# Allegro board GALVO_DRV.brd
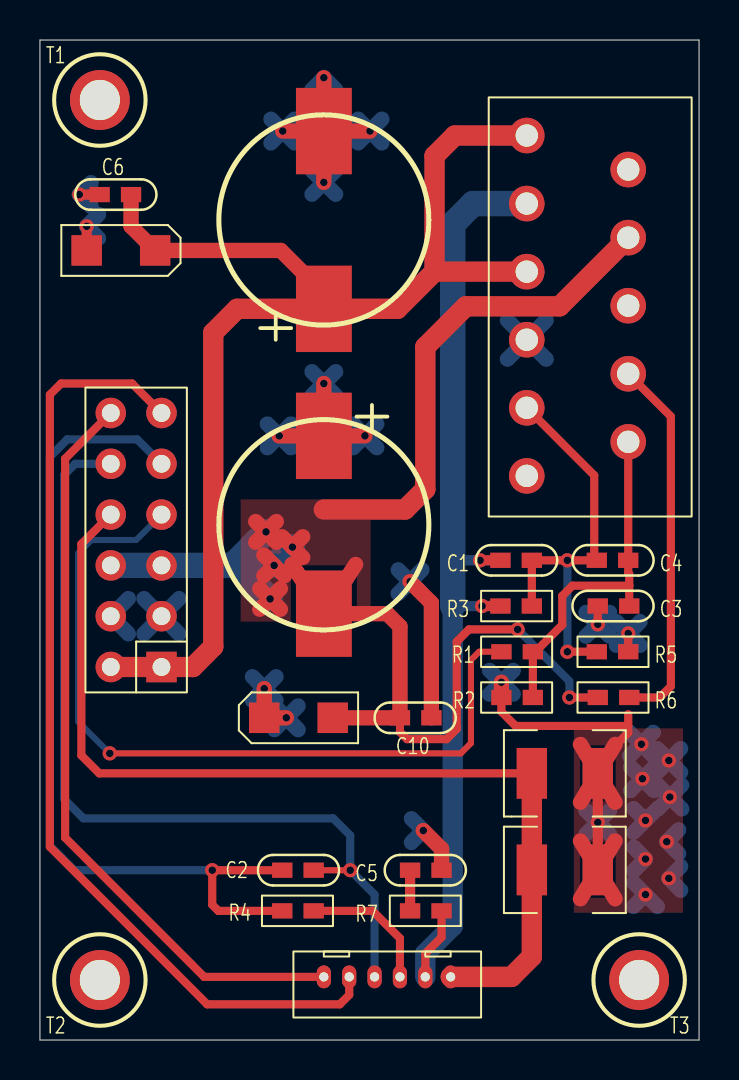
[diagram p0: board, top side]
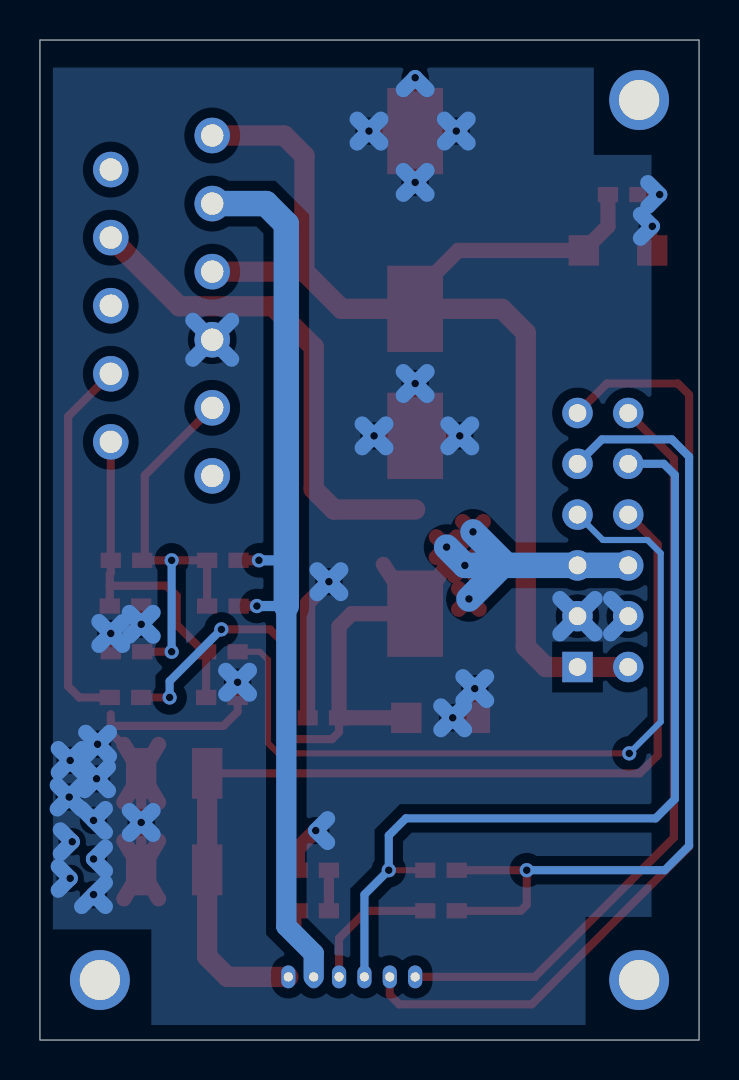
[diagram p1: board, bottom side, seen from below]

Outline 33 x 50 mm; copper layers: TOP, BOTTOM. Coordinates in mm from the lower left corner of the outline.
Outline path: 0,50 33,50 33,0 0,0 0,50

## Placement (name value [footprint] x y rotation side)
C1  15pF  [0603C]  24.63 23.98 180 top
C2  0.1uF  [0603C]  13.71 8.49 180 top
C3  220pF  [0603C]  27.93 21.7 0 top
C4  220pF  [0603C]  29.45 23.98 180 top
C5  0.1uF  [0603C]  18.53 8.49 0 top
C6  0.1uF  [0603C]  4.56 42.27 180 top
C7  220uF  [C_SMD_ALUELE_D10]  14.21 41 90 top
C8  10uF  [1206]  4.05 39.48 180 top
C9  220uF  [C_SMD_ALUELE_D10]  14.21 25.76 270 top
C10  0.1uF  [0603C]  18.02 16.11 0 top
C11  10uF  [1206]  12.94 16.11 0 top
J1  DRV_IF  [IDC12]  4.82 26.27 180 top
J2  TO_MOTOR  [SIP6_1D27Z]  14.21 3.16 0 top
R1  1K  [0603R]  23.1 19.41 0 top
R2  33K  [0603R]  23.1 17.13 0 top
R3  2K  [0603R]  24.63 21.7 180 top
R4  200  [0603R]  12.13 6.46 0 top
R5  1K  [0603R]  29.45 19.41 180 top
R6  30k  [0603R]  27.93 17.13 0 top
R7  10  [0603R]  18.53 6.46 0 top
R8  0.1  [1210]  26.28 8.51 180 top
R9  0.1  [1210]  26.28 13.33 180 top
T1  HOLE  [HOLE_D2MM]  3 47 0 top
T2  HOLE  [HOLE_D2MM]  3 3 0 top
T3  HOLE  [HOLE_D2MM]  30 3 0 top
U1  LM3886/TO220  [TO220-11]  24.37 45.22 270 top

## Library data of the parts
C1-C6 C10 = CAP NP
C7-C9 C11 = CAP POL
J1 = HEADER 6X2
J2 = CON6: User Part Number: ***
R1-R9 = R
T1-T3 = CON1
U1 = LM3886/TO220_4

## Footprints (pads in the part's own frame, mm; a bottom-side part is the same pattern mirrored in y, then rotated)
0603C
  rect 1.016x0.762 smd: 1(0,0) 2(1.575,0)
0603R
  rect 1.016x0.762 smd: 1(0,0) 2(1.575,0)
1206
  rect 1.524x1.524 smd: 1(-1.714,0) 2(1.714,0)
1210
  rect 1.524x2.54 smd: 1(-1.651,0) 2(1.651,0)
C_SMD_ALUELE_D10
  rect 4.318x2.794 smd: 1(-4.445,0) 2(4.445,0)
HOLE_D2MM
  round 2.997 hole 2.007: 1(0,0)
IDC12
  rect 1.524x1.524 hole 0.889: 1(-1.27,7.62)
  round 1.524 hole 0.889: 2(1.27,7.62) 3(-1.27,5.08) 4(1.27,5.08) 5(-1.27,2.54) 6(1.27,2.54) 7(-1.27,0) 8(1.27,0) 9(-1.27,-2.54) 10(1.27,-2.54) 11(-1.27,-5.08) 12(1.27,-5.08)
SIP6_1D27Z
  oval 0.711x1.143 hole 0.457: 1(0,0) 2(1.27,0) 3(2.54,0) 4(3.81,0) 5(5.08,0) 6(6.35,0)
TO220-11
  round 1.778 hole 1.118: 1(0,0) 2(1.702,5.08) 3(3.404,0) 4(5.105,5.08) 5(6.807,0) 6(8.509,5.08) 7(10.211,0) 8(11.913,5.08) 9(13.614,0) 10(15.316,5.08) 11(17.018,0)

## Nets
AGND: C2.1 J1.10 J2.3
PGND: C3.1 C5.2 C6.2 C7.2 C8.2 C9.1 C10.2 C11.1 J1.3 J1.4 R2.1 R5.1 R8.1 R9.1 U1.7(GND)
CUR_SAMP: J1.8 J2.6 R8.2 R9.2
LED_DRV: J2.4 R4.2
M_POS1: J1.11 J2.2
M_POS2: J1.12 J2.1
MOTOR_VDRV: J1.7 R1.1
VAA12VP: C2.2 J1.9 R4.1
VPP: C6.1 C7.1 C8.1 J1.1 J1.2 U1.1(+VCC1) U1.5(+VCC5)
VPPN: C9.2 C10.1 C11.2 J1.5 J1.6 R6.1 U1.4(-VCC)
N41724: C3.2 C4.1 R1.2 R2.2 U1.10(+VIN)
N41785: C1.1 C4.2 R3.1 R5.2 U1.9(-VIN)
N41807: C1.2 J2.5 R3.2 R7.2 U1.3(OUT)
N128992: R6.2 U1.8(MUTE)
N131947: C5.1 R7.1

Pads without a net: T1 1; T2 1; T3 1; U1 2 6 11

## Via types
v1: diameter 0.711, hole 0.381, TOP to BOTTOM, 39 vias

## Routing (per net, layer and track width the routed paths; a pad name or vN(x,y) marks a point on that pad's centre or on a via; arc(x,y) is an arc through that point)
AGND: length 43.3
  TOP w0.305: v1(15.53,8.49) C2.1
  BOTTOM w0.406: J1.10 1.77,28.81 1.21,28.25 1.21,12.05 2.17,11.08 14.68,11.08 15.53,10.23 v1(15.53,8.49) 16.75,7.27 J2.3
PGND: length 149.6
  TOP w0.406: 29.45,15.7 29.45,16.29 ; 29.45,15.7 29.45,15.36 27.93,13.84 R9.1 ; 29.45,15.7 23.82,15.7 23.1,16.41 R2.1 ; R5.1 v1(29.45,20.33) ; C3.1 v1(27.93,20.78)
  TOP w0.508: C8.2 v1(2.34,40.68) ; R8.1 v1(27.93,10.88) R9.1 ; C6.2 v1(1.97,42.27)
  TOP w0.762: v1(14.21,48.11) C7.2 ; C7.2 v1(14.21,42.88) ; C7.2 v1(12.16,45.45) ; C7.2 v1(16.53,45.45) ; v1(18.53,22.92) 19.6,21.85 C10.2 ; v1(19.19,10.47) 20.11,9.56 C5.2 ; R8.1 28.8,9.95 ; R8.1 27.06,9.95 ; R8.1 27.06,7.06 ; R8.1 28.8,7.06 ; v1(12.33,16.11) C11.1 v1(11.23,17.57) ; C9.1 v1(16.27,30.21) ; C9.1 v1(14.21,32.82) ; C9.1 v1(11.98,30.21) ; R9.1 28.8,14.78 ; R9.1 27.06,14.78 ; R9.1 27.06,11.88 ; R9.1 28.8,11.88 ; v1(23.1,17.89) R2.1
  BOTTOM w0.762: v1(14.21,32.82) 14.81,33.42 ; v1(14.21,32.82) 13.62,32.23 ; v1(14.21,32.82) 13.62,33.42 ; v1(14.21,32.82) 14.81,32.23 ; v1(16.53,45.45) 17.12,44.85 ; v1(16.53,45.45) 17.12,46.04 ; v1(16.53,45.45) 15.93,44.85 ; v1(16.53,45.45) 15.93,46.04 ; v1(16.27,30.21) 16.86,30.8 ; v1(16.27,30.21) 15.68,30.8 ; v1(16.27,30.21) 15.68,29.61 ; v1(16.27,30.21) 16.86,29.61 ; 13.62,47.52 v1(14.21,48.11) 14.81,47.52 ; 11.56,44.85 v1(12.16,45.45) ; v1(12.16,45.45) 12.75,46.04 ; v1(12.16,45.45) 11.56,46.04 ; v1(12.16,45.45) 12.75,44.85 ; 32.08,8.68 v1(31.49,8.08) 32.08,7.49 ; v1(30.32,10.98) 30.91,11.57 ; v1(30.32,10.98) 29.72,10.39 ; v1(30.32,10.98) 29.72,11.57 ; v1(31.54,12.15) 32.13,12.74 ; v1(31.54,12.15) 30.94,12.74 ; v1(31.54,12.15) 32.13,11.55 ; v1(31.54,12.15) 30.94,11.55 ; 2.93,41.28 v1(2.34,40.68) 2.93,40.09 ; 27.34,20.19 v1(27.93,20.78) ; v1(27.93,20.78) 28.52,21.38 ; v1(27.93,20.78) 27.34,21.38 ; v1(27.93,20.78) 28.52,20.19 ; 23.4,34.04 U1.7 ; U1.7 25.34,35.98 ; U1.7 23.4,35.98 ; U1.7 25.34,34.04 ; 31.98,10.51 v1(31.38,9.91) 31.98,9.32 ; 11.74,15.52 v1(12.33,16.11) ; v1(12.33,16.11) 12.93,16.7 ; v1(12.33,16.11) 12.93,15.52 ; v1(12.33,16.11) 11.74,16.7 ; v1(29.45,20.33) 30.05,19.73 ; v1(29.45,20.33) 28.86,19.73 ; v1(29.45,20.33) 30.05,20.92 ; v1(29.45,20.33) 28.86,20.92 ; 11.39,30.8 v1(11.98,30.21) ; v1(11.98,30.21) 11.39,29.61 ; v1(11.98,30.21) 12.57,29.61 ; v1(11.98,30.21) 12.57,30.8 ; 4.43,20.31 J1.4 4.43,22.07 ; 5.21,22.07 J1.3 ; J1.3 5.21,20.31 ; J1.3 6.97,22.07 ; J1.3 6.97,20.31 ; v1(23.1,17.89) 23.7,18.48 ; v1(23.1,17.89) 22.51,17.29 ; v1(23.1,17.89) 22.51,18.48 ; v1(23.1,17.89) 23.7,17.29 ; 29.72,8.46 v1(30.32,9.05) 29.72,9.64 ; 18.6,11.06 v1(19.19,10.47) 18.6,9.88 ; v1(30.17,13.06) 30.76,13.66 ; v1(30.17,13.06) 30.76,12.47 ; v1(30.17,13.06) 29.57,13.66 ; v1(30.17,13.06) 29.57,12.47 ; v1(30.32,7.27) 30.91,6.68 ; v1(30.32,7.27) 29.72,7.86 ; v1(30.32,7.27) 29.72,6.68 ; v1(14.21,42.88) 14.81,43.47 ; v1(14.21,42.88) 13.62,42.29 ; v1(14.21,42.88) 13.62,43.47 ; v1(14.21,42.88) 14.81,42.29 ; 17.94,23.51 v1(18.53,22.92) ; v1(18.53,22.92) 19.13,23.51 ; v1(18.53,22.92) 17.94,22.32 ; v1(18.53,22.92) 19.13,22.32 ; 27.34,10.28 v1(27.93,10.88) ; v1(27.93,10.88) 28.52,10.28 ; v1(27.93,10.88) 28.52,11.47 ; v1(27.93,10.88) 27.34,11.47 ; 2.56,42.87 v1(1.97,42.27) 2.56,41.68 ; v1(11.23,17.57) 11.82,18.16 ; v1(11.23,17.57) 11.82,16.98 ; v1(11.23,17.57) 10.64,18.16 ; v1(11.23,17.57) 10.64,16.98 ; 30.89,14.57 v1(31.49,13.98) ; v1(31.49,13.98) 32.08,13.38 ; v1(31.49,13.98) 32.08,14.57 ; v1(31.49,13.98) 30.89,13.38 ; 29.52,14.2 v1(30.11,14.79) ; v1(30.11,14.79) 30.71,14.2 ; v1(30.11,14.79) 29.52,15.38 ; v1(30.11,14.79) 30.71,15.38
CUR_SAMP: length 49.2
  TOP w0.406: R9.2 2.97,13.33 2.07,14.23 2.07,24.8 J1.8
  TOP w1.016: R9.2 R8.2 24.63,4.17 23.61,3.16 J2.6
LED_DRV: length 6.8
  TOP w0.406: R4.2 16.65,6.46 18.02,5.09 J2.4
M_POS1: length 48.4
  TOP w0.406: J2.2 15.48,2.25 15.01,1.78 8.37,1.78 0.5,9.66 0.5,32.26 1.06,32.82 4.61,32.82 J1.11
M_POS2: length 38
  TOP w0.406: J1.12 1.26,29.06 1.26,10.12 8.22,3.16 J2.1
MOTOR_VDRV: length 39.8
  TOP w0.305: v1(3.5,14.33) 21.07,14.33 21.58,14.84 21.58,19.01 21.99,19.41 R1.1
  BOTTOM w0.305: J1.7 4.82,25 2.58,25 1.92,24.34 1.92,15.91 v1(3.5,14.33)
VAA12VP: length 43.4
  TOP w0.406: C2.2 v1(8.63,8.49) 8.63,6.76 8.93,6.46 R4.1
  BOTTOM w0.406: v1(8.63,8.49) 1.72,8.49 0.5,9.71 0.5,29.17 1.36,30.03 4.87,30.03 J1.9
VPP: length 62.4
  TOP w0.762: C7.1 14.21,37.32 12.05,39.48 C8.1 4.56,40.68 C6.1
  TOP w1.016: 19.76,38.42 19.76,44.21 20.77,45.22 U1.1 ; 19.76,38.42 U1.5 ; 19.76,38.42 17.9,36.56 C7.1 9.87,36.56 8.68,35.36 8.68,19.67 7.66,18.65 J1.1 J1.2
VPPN: length 84.9
  TOP w0.406: v1(26.51,17.13) R6.1 ; v1(23.92,20.53) 21.48,20.53 20.87,19.92 20.87,15.55 20.36,15.04 18.38,15.04 18.02,15.4 C10.1
  TOP w0.762: C9.2 17.39,21.32 18.02,20.68 C10.1 C11.2 ; C9.2 15.81,23.78 ; C9.2 12.62,23.78 ; v1(11.32,25.41) 11.84,25.92 ; v1(11.32,25.41) 10.8,25.92 ; v1(11.32,25.41) 10.8,24.89 ; v1(11.32,25.41) 11.84,24.89 ; v1(11.72,23.73) 12.24,23.21 ; v1(11.72,23.73) 11.21,24.25 ; v1(11.72,23.73) 11.21,23.21 ; 12.12,25.16 v1(12.64,24.64) ; v1(12.64,24.64) 13.16,24.13 ; v1(12.64,24.64) 13.16,25.16 ; v1(11.52,22.05) 12.04,22.57 ; v1(11.52,22.05) 11,21.54 ; v1(11.52,22.05) 11,22.57 ; v1(11.52,22.05) 12.04,21.54
  TOP w1.016: U1.4 26.02,36.68 21.33,36.68 19.29,34.65 19.29,27.54 18.28,26.52 14.21,26.52
  BOTTOM w0.406: v1(26.51,17.13) 26.51,17.94 v1(23.92,20.53)
  BOTTOM w1.016: 9.85,23.73 9.64,23.73
  BOTTOM w1.27: v1(11.52,22.05) 9.85,23.73 v1(11.72,23.73) v1(12.64,24.64) ; v1(11.32,25.41) 9.64,23.73 J1.5 J1.6
N41724: length 17.6
  TOP w0.406: R2.2 R1.2 24.81,19.41 26.15,20.76 26.15,22.21 26.66,22.71 29.5,22.71 ; 29.5,22.71 29.5,23.3 29.45,23.35 C4.1 U1.10 ; 29.5,22.71 C3.2
N41785: length 20.6
  TOP w0.254: 27.75,23.98 C4.2
  TOP w0.406: R3.1 C1.1 v1(26.41,23.98) 27.75,23.98 27.75,28.23 U1.9 ; R5.2 v1(26.41,19.41)
  BOTTOM w0.406: v1(26.41,19.41) v1(26.41,23.98)
N41807: length 50.8
  TOP w0.406: J2.5 19.29,4.32 20.11,5.14 R7.2
  TOP w0.508: C1.2 v1(22.04,23.98) ; R3.2 v1(22.14,21.7)
  BOTTOM w0.508: 20.67,24.03 20.72,23.98 v1(22.04,23.98) ; 20.67,21.7 v1(22.14,21.7)
  BOTTOM w1.016: J2.5 19.29,4.32 20.67,5.7 20.67,21.7
  BOTTOM w1.27: U1.3 21.69,41.82 20.67,40.8 20.67,21.7
N128992: length 18.8
  TOP w0.406: R6.2 31.03,17.13 31.59,17.68 31.59,31.18 U1.8
N131947: length 2
  TOP w0.508: C5.1 R7.1

## Copper pours and planes (outline as drawn; the poured copper is in the pictures)
PGND on TOP: 26.73,15.58 26.73,6.36 32.2,6.36 32.2,15.58
PGND on BOTTOM: 2.38,6.15 5.68,6.15 5.68,0.75 27.42,0.75 27.42,5.53 32.35,5.53 32.35,48.62 5.27,48.62 5.27,44.25 2.38,44.25 ; 2 cut-outs
VPPN on TOP: 10.05,27.03 10.05,20.92 16.55,20.92 16.55,27.03
